# Altium PCB SC8701_EVM_RE1_0620.PcbDoc
Units mil, origin at the board's own origin, x right, y up, seen from the top; angles counter-clockwise.
Board outline 5000 x 3400 mil, 4 copper layers (Top Layer, Signal Layer 1, Signal Layer 2, Bottom Layer), stack 62.449 mil thick; 104 components, 48 nets, 304 pads, 9 vias.
Unrouted connection lines stored in the file: 170.
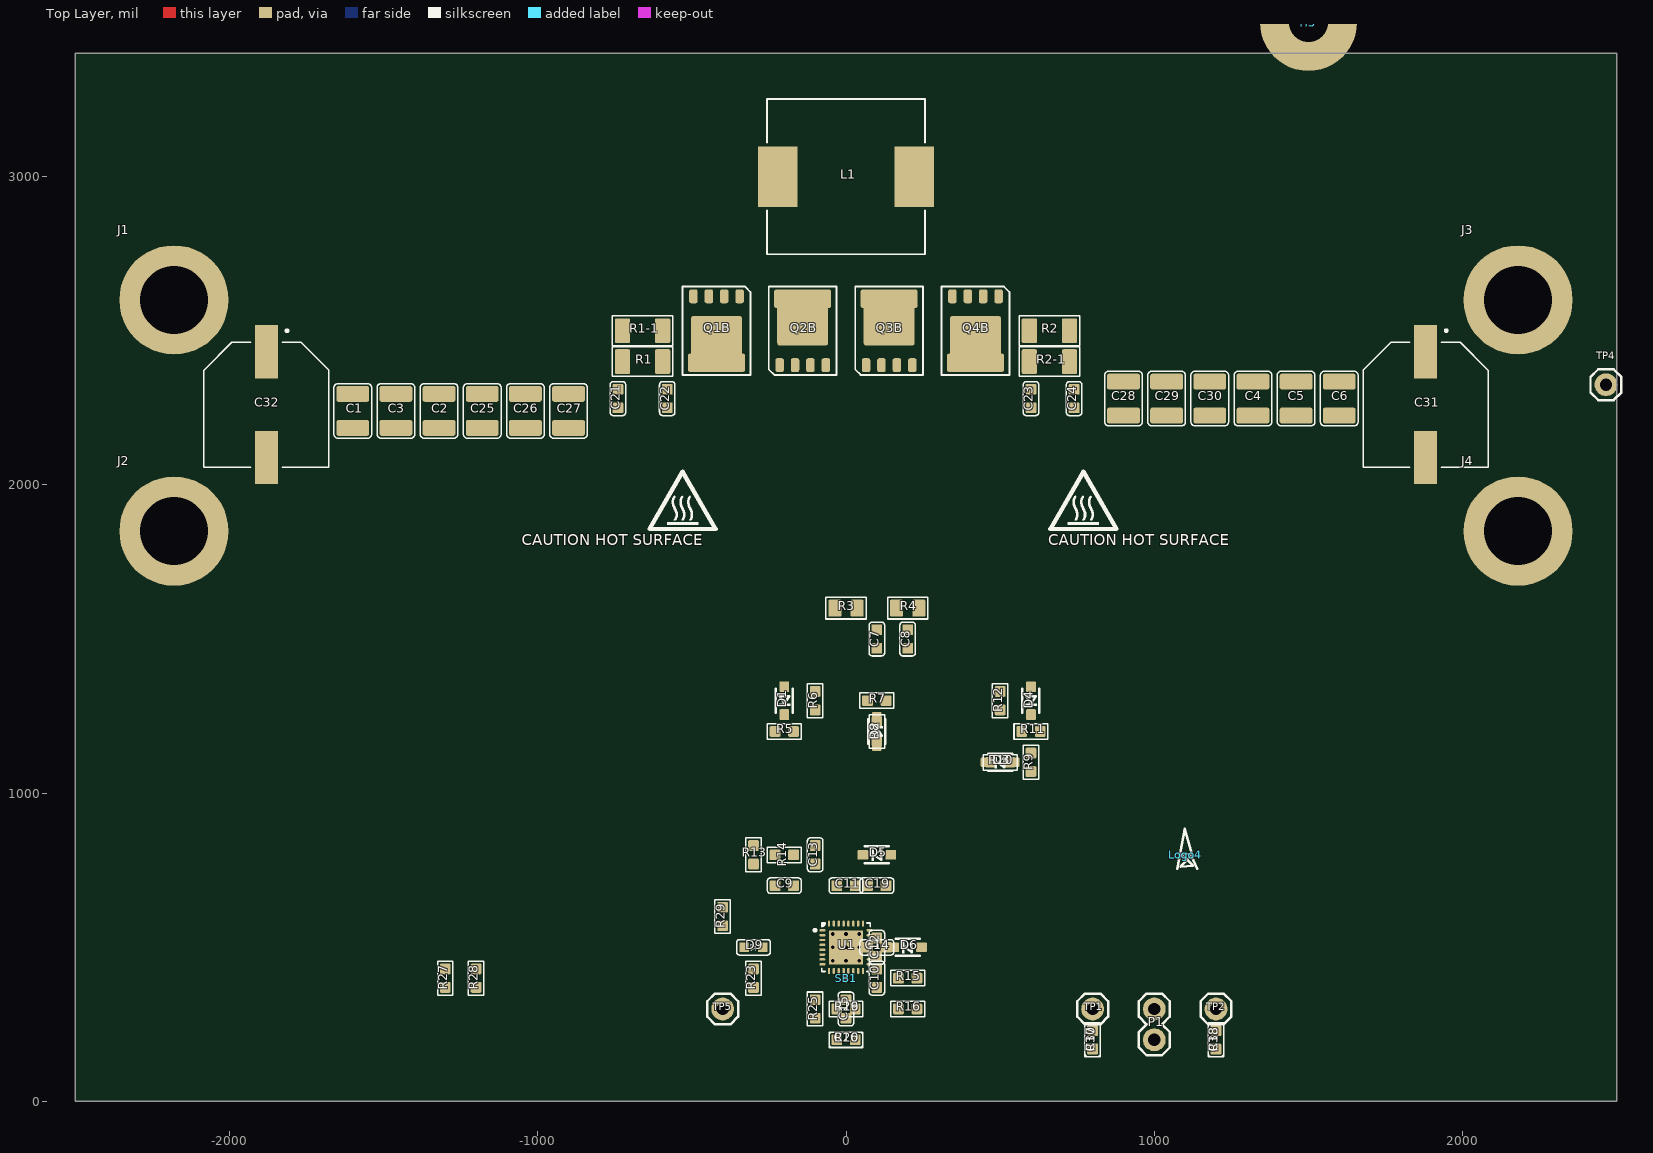
[diagram p0: Top Layer view]
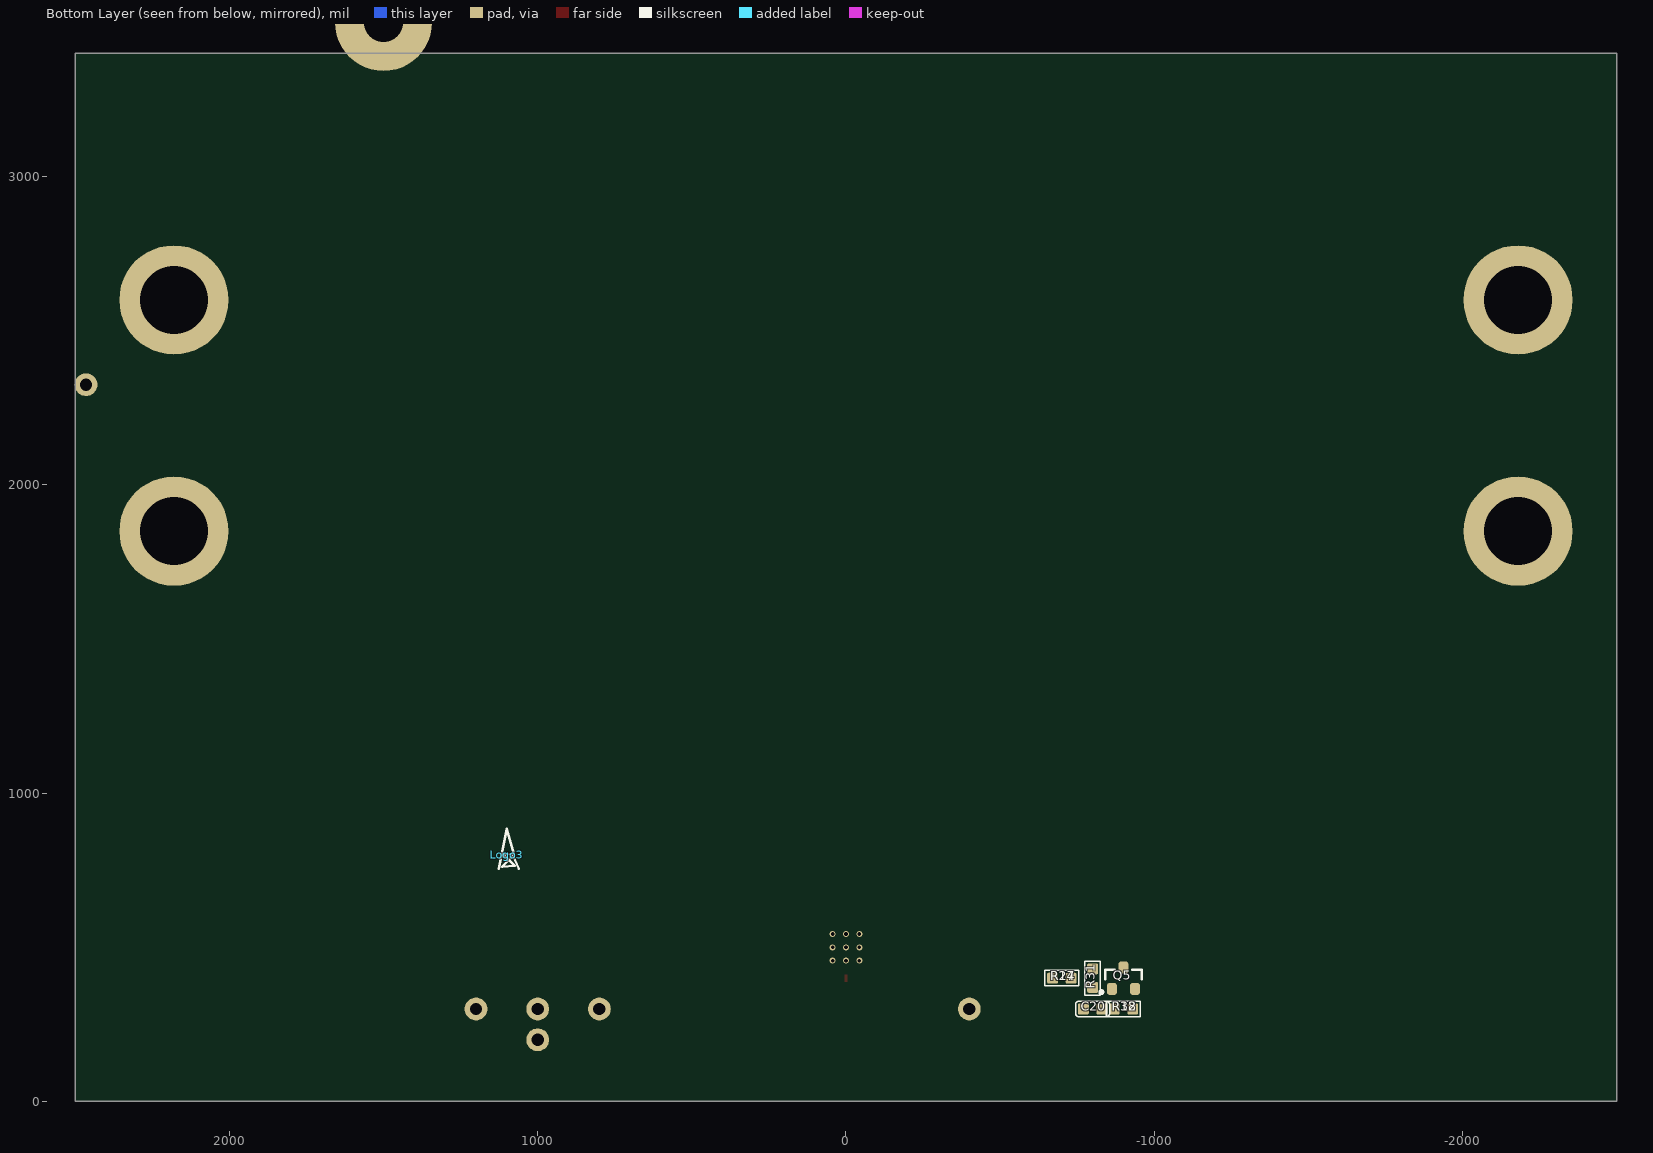
[diagram p1: Bottom Layer view, seen from below]

## Layer stack, top to bottom
Top Solder: solder mask 0.4, Solder Resist, Dk 3.5
Top Layer: signal copper 1.378
Dielectric1: prepreg 8.2835, FR-4, Dk 4.2
Signal Layer 1: signal copper 0.5984
Dielectric2: core 41.9291, Dk 4.2
Signal Layer 2: signal copper 0.5984
Dielectric3: prepreg 8.2835, Dk 4.2
Bottom Layer: signal copper 1.378
Bottom Solder: solder mask 0.4, Solder Resist, Dk 3.5

## Board outline
-2500,0 -2500,3400 2500,3400 2500,0

## Design rules (kind name [scope] priority, off if disabled: settings)
BoardOutlineClearance [All] p1: gap=11.81 ignorepadtopadclearanceinfootprint=FALSE except(0: Arc-SplitContinuation Track-SplitContinuation SMDPad-SplitContinuation THPad-SplitContinuation Via-SplitContinuation Fill-SplitContinuation Poly-SplitContinuation Region-SplitContinuation Text-SplitContinuation)
Clearance "Stitching VOUT" [IsStitchingVia and InNet('VOUT') vs (IsVia and (Not IsStitchingVia)) Or IsPad] p1: gap=5 ignorepadtopadclearanceinfootprint=FALSE
Clearance "PGND vs via" [(InNet('GND') AND InPolygon) vs IsVia] p2: gap=12 ignorepadtopadclearanceinfootprint=FALSE except(0: Arc-Hole Track-Hole SMDPad-Hole THPad-Hole Via-Hole Fill-Hole Poly-Hole Region-Hole Text-Hole)
Clearance "pour clearance_1" [InPolygon] p3: gap=10 ignorepadtopadclearanceinfootprint=FALSE except(0: Arc-Hole Track-Hole SMDPad-Hole THPad-Hole Via-Hole Fill-Hole Poly-Hole Region-Hole Text-Hole)
Clearance [All] p4: gap=7.8 ignorepadtopadclearanceinfootprint=FALSE except(0: Arc-Hole Track-Hole SMDPad-Hole THPad-Hole Via-Hole Fill-Hole Poly-Hole Region-Hole Text-Hole; 5.91: Arc-Via Track-Via SMDPad-SMDPad)
HoleSize [All] p1: absolutevalues=TRUE maxlimit=270 minlimit=11 maxpercent=80.000 minpercent=20.000
MinimumSolderMaskSliver [All] p1: minsoldermaskwidth=0
PlaneConnect PlaneConnect_1 [(InComponent('J1') AND InComponent('J2') AND InComponent('J3') AND InComponent('J4'))] p1: planeconnectstyle=Direct reliefexpansion=20 reliefentries=4 reliefconductorwidth=10 reliefairgap=10
PlaneConnect PlaneConnect_2 [InNet('AGND') and InNet('GND')] p2: planeconnectstyle=Relief reliefexpansion=20 reliefentries=4 reliefconductorwidth=10 reliefairgap=10
PlaneConnect [All] p3: planeconnectstyle=Direct reliefexpansion=20 reliefentries=4 reliefconductorwidth=10 reliefairgap=10
PolygonConnect AGND [All vs (HasFootprint('HDR1X2') OR HasFootprint('HDR1X3'))] p1: connectstyle=Relief reliefconductorwidth=10 reliefentries=4 polygonreliefangle="90 Angle" airgapwidth=10
PolygonConnect "P1 and P2" [All vs (InComponent('P1') OR InComponent('P2'))] p2: connectstyle=Relief reliefconductorwidth=10 reliefentries=4 polygonreliefangle="90 Angle" airgapwidth=10
PolygonConnect [All] p3: connectstyle=Direct reliefconductorwidth=10 reliefentries=4 polygonreliefangle="90 Angle" airgapwidth=10
RoutingVias [All] p1: holewidth=16 width=24 viastyle="Through Hole" minholewidth=12 minwidth=20 maxholewidth=28 maxwidth=50
ShortCircuit [InNet('AGND') vs InNet('PGND')] p1: allowed=TRUE
SilkToSilkClearance [All] p1 off: silktosilkclearance=7
SilkToSolderMaskClearance [IsPad] p1 off: minsilkscreentomaskgap=7 clearancetoexposedcopper=TRUE
SolderMaskExpansion SolderMaskExpansion_Via [ObjectKind = 'Via'] p1: expansion=2 istentingtop=TRUE
SolderMaskExpansion [All] p2: expansion=2 istentingtop=FALSE
Width [All] p1: maxlimit=30 minlimit=7.8 preferedwidth=7.87
24 further rules are at their usual default settings.

## Components (designator, comment, footprint, x,y, rotation, side; value= is the part's Value field where it differs from the comment)
C1 "10uF/50V" C1210 -1600,2240 r90 top
C2 "10uF/50V" C1210 -1320,2240 r90 top
C3 "10uF/50V" C1210 -1460,2240 r90 top
C4 "10uF/50V" C1210 1320,2280 r90 top
C5 "10uF/50V" C1210 1460,2280 r90 top
C6 "10uF/50V" C1210 1600,2280 r90 top
C7 "NC" C0603 100,1500 r90 top
C8 "NC" C0603 200,1500 r90 top
C9 "47pF/6.3V" C0603 -200,700 r0 top
C10 "47pF/6.3V" C0603 100,400 r270 top
C11 "100nF/16V" C0603 0,700 r0 top
C12 "100nF/16V" C0603 100,500 r270 top
C13 "1uF/50V" C0603 -100,800 r90 top
C14 "1uF/50V" C0603 100,500 r0 top
C15 "NC" C0603 0,300 r90 top
C16 "15nF/6.3V" C0603 0,200 r180 top
C17 "10nF/6.3V" C0603 800,200 r90 top
C18 "10nF/6.3V" C0603 1200,200 r90 top
C19 "1uF/16V" C0603 100,700 r180 top
C20 "1uF/50V" C0603 -800,300 r180 bottom
C21 "100nF/50V" C0603 -740,2280 r90 top
C22 "100nF/50V" C0603 -580,2280 r90 top
C23 "100nF/50V" C0603 600,2280 r90 top
C24 "100nF/50V" C0603 740,2280 r90 top
C25 "10uF/50V" C1210 -1180,2240 r90 top
C26 "10uF/50V" C1210 -1040,2240 r90 top
C27 "10uF/50V" C1210 -900,2240 r90 top
C28 "10uF/50V" C1210 900,2280 r90 top
C29 "10uF/50V" C1210 1040,2280 r90 top
C30 "10uF/50V" C1210 1180,2280 r90 top
C31 "100uF/50V" "CAP OS-CON D=10.0 L=10.0 F10" 1880,2260 r270 top
C32 "100uF/50V" "CAP OS-CON D=10.0 L=10.0 F10" -1880,2260 r270 top
D1 "1N4148" SOD-323 -200,1300 r270 top
D2 "1N4148" SOD-323 100,1200 r90 top
D3 "1N4148" SOD-323 500,1100 r180 top
D4 "1N4148" SOD-323 600,1300 r270 top
D5 "1N4148" SOD-323 100,800 r180 top
D6 "1N4148" SOD-323 200,500 r180 top
D9 "BLUE-LED" LED0603_BLUE -300,500 r0 top value=color?
H1 "HOLE" "M3.2 D=8" -3635,125 r0 top
H2 "HOLE" "M3.2 D=8" 3215,-25 r0 top
H3 "HOLE" "M3.2 D=8" 1500,3500 r0 top
H4 "HOLE" "M3.2 D=8" 4200,2500 r0 top
J1 "U6047" JACK_BANANA_U6047 -2180,2600 r0 top
J2 "U6047" JACK_BANANA_U6047 -2180,1850 r0 top
J3 "U6047" JACK_BANANA_U6047 2180,2600 r0 top
J4 "U6047" JACK_BANANA_U6047 2180,1850 r0 top
L1 "3.3uH" "INDUCTOR 1350 12.6X13.5X5.0mm" 0,3000 r0 top
LOGO1 "CAUTION HOT SURFACE" IEC_HotSurface_Small 9100,8200 r0 top
LOGO2 "CAUTION HOT SURFACE" IEC_HotSurface_Small 7800,8200 r0 top
Logo3 "OldGerman Symbol" ODG_LOGO 1100,800 r180 bottom
Logo4 "OldGerman Symbol" ODG_LOGO 1100,800 r0 top
P1 "CONN_X2" 2.54mm_Male_x2 1000,200 r90 top
P2 "CONN_X3" 2.54mm_Male_x3 5215,-925 r180 top
P3 "CONN_X3" 2.54mm_Male_x3 5415,-925 r0 top
P4 "CONN_X3" 2.54mm_Male_x3 6515,-925 r180 top
P5 "CONN_X3" 2.54mm_Male_x3 6915,-925 r180 top
P6 "CONN_X3" 2.54mm_Male_x3 7115,-925 r0 top
P7 "CONN_X2" 2.54mm_Male_x2 5815,-925 r0 top
Q1B "N-MOS_GDS" "SO8FL ROUND" -420,2500 r270 top
Q2B "N-MOS_GDS" "SO8FL ROUND" -140.39,2500 r90 top
Q3B "N-MOS_GDS" "SO8FL ROUND" 140,2500 r90 top
Q4B "N-MOS_GDS" "SO8FL ROUND" 420,2500 r270 top
Q5 "N-MOS" "INFINEON SOT-23-3" -900,400 r90 bottom
R1 "10mR" R1206 -660,2400 r0 top
R1-1 "NC" R1206 -660,2500 r0 top
R2 "10mR" R1206 660,2500 r0 top
R2-1 "NC" R1206 660,2400 r0 top
R3 "NC" R0805 0,1600 r180 top
R4 "NC" R0805 200,1600 r0 top
R5 "0R" R0603 -200,1200 r180 top
R6 "0R" R0603 -100,1300 r90 top
R7 "0R" R0603 100,1300 r0 top
R8 "0R" R0603 100,1200 r270 top
R9 "0R" R0603 600,1100 r90 top
R10 "0R" R0603 500,1100 r0 top
R11 "0R" R0603 600,1200 r0 top
R12 "0R" R0603 500,1300 r90 top
R13 "1K" R0603 -300,800 r90 top
R14 "1K" R0603 -200,800 r180 top
R15 "1K" R0603 200,400 r180 top
R16 "1K" R0603 200,300 r180 top
R17 "200K" R0603 -700,400 r0 bottom
R18 "10K" R0603 -900,300 r180 bottom
R19 "100K" R0603 0,300 r0 top
R20 "32.4K" R0603 0,200 r180 top
R23 "0R" R0603 -300,400 r90 top
R24 "100K" R0603 -700,400 r0 bottom
R25 "68K" R0603 -100,300 r90 top
R26 "15K" R0603 0,300 r0 top
R27 "100K" R0603 -1300,400 r90 top
R28 "150K" R0603 -1200,400 r270 top
R29 "100K" R0603 -400,600 r270 top
R30 "12.1K" R0603 800,200 r90 top
R31 "100K" R0603 -800,400 r90 bottom
R32 "24K" R0603 -900,300 r0 bottom
R33 "40.2K" R0603 1200,200 r90 top
SB1 "NetTie_200um" NetTie_200um 0,400 r90 top net-tie
TP1 "CONN_X1_DOT" 2.54mm_Male_x1 800,300 r0 top
TP2 "CONN_X1_DOT" 2.54mm_Male_x1 1200,300 r0 top
TP3 "CONN_X1_DOT" 2.54mm_Male_x1 3455,2045 r0 top
TP4 "CONN_X1_DOT" 2.54mm_Male_x1 2465,2325 r0 top
TP5 "CONN_X1_DOT" 2.54mm_Male_x1 -400,300 r0 top
U1 "SC8701 (A)" "TQFN-32 4X4MM 0.4 VIA" 0,500 r0 top

## Footprints (in the part's own frame and the unit in brackets; to place one, negate y for a bottom-side part, rotate by r counter-clockwise, add the part's x,y. Pads: shape width x height; smd on the part's side, far side on the other; paste and mask are expansions set on the pad)
2.54mm_Male_x1 [mil]
  round 74 hole 40: 1(0,0)
  silkscreen extent -50,-50 50,50
2.54mm_Male_x2 [mil]
  round 74 hole 40: 1(0,0) 2(100,0)
  silkscreen extent -50,-50 150,50
2.54mm_Male_x3 [mil]
  round 74 hole 40: 1(0,0) 2(100,0) 3(200,0)
  silkscreen extent -50,-50 250,50
C0603 [mil]
  rrect20% 35x35 smd: 1(-30,0) 2(30,0)
  silkscreen extent -55,-25 55,25, body extent -31,-16 32,16, height 32
C1210 [mm] "Chip Capacitor, 2-Leads, Body 3.20x2.50mm, IPC Medium Density"
  rrect25% 1.3x2.7 smd: 1(-1.4,0) 2(1.4,0)
  silkscreen extent -2.25,-1.55 2.25,1.55, body extent -1.6,-1.25 1.6,1.25, height 2.8
"CAP OS-CON D=10.0 L=10.0 F10" [mm]
  rect 4.4x1.9 smd: 1(-4.35,0) 2(4.35,0)
  silkscreen extent -6.2,-5.15 5.15,5.15, body extent -5.5,-5.15 5.5,5.15, height 10.4
IEC_HotSurface_Small [mil] "CAUTION HOT SURFACE"
  silkscreen extent -8437,-6343 -8223,-6158
"INDUCTOR 1350 12.6X13.5X5.0mm" [mm]
  rect 3.25x5 smd: 1(-5.625,0) 2(5.625,0)
  silkscreen extent -6.5,-6.4 6.5,6.4, body extent -6.5,-6.4 6.5,6.4, height 6.2
"INFINEON SOT-23-3" [mm] "SOT23, 3-Leads, Body 2.90x2.40mm, Pitch 0.95mm, IPC Medium Density"
  rrect50% 0.972x0.802 smd: 1(-0.885,0.95) 2(-0.885,-0.95) 3(0.885,0)
  silkscreen extent -1.27,-1.5 0.7,1.95, body extent -1.16,-1.45 1.16,1.45, height 1
JACK_BANANA_U6047 [mm] "Banana Jack"
  round 9 hole 5.6: 1(0,0)
  body extent -3.49,-3.5 3.49,3.5, height 2
LED0603_BLUE [mm] "Chip Diode, 2-Leads, Body 1.60x0.80mm, IPC Medium Density"
  rrect20% 0.8x0.8 smd: 1(-0.762,0) 2(0.762,0)
  silkscreen extent -1.4,-0.64 1.4,0.64, body extent -0.8,-0.4 0.8,0.4, height 0.53
"M3.2 D=8" [mm]
  round 8 hole 3.2: 1(0,0)
NetTie_200um [mm]
  round 0.2 smd paste-2 mask-2: 1(-0.3,0) 2(0.3,0)
  Top Layer region: -0.3,0.1 -0.3,-0.1 0.3,-0.1 0.3,0.1
ODG_LOGO [mil]
  silkscreen extent -26,-46 39,84
R0603 [mil]
  rrect25% 35x35 smd: 1(-30,0) 2(30,0)
  silkscreen extent -55,-25 55,25, body extent -31,-16 31,16, height 18
R0805 [mil]
  rrect20% 42.5x55 smd: 1(-36.26,0) 2(36.26,0)
  silkscreen extent -65,-35 65,35, body extent -39,-25 39,25, height 24
R1206 [mil]
  rrect20% 50x80 smd: 1(-65,0) 2(65,0)
  silkscreen extent -98,-48 98,48, body extent -63,-31 63,31, height 24
"SO8FL ROUND" [mm] "AND9137/D Universal Footprint"
  rrect12% 3.3x4.2 smd paste-10 mask+0.075: D(0.438,0)
  rrect20% 1.5x4.7 smd paste-10 mask+0.075: D(2.638,0)
  rrect50% 1.15x0.7 smd paste-0.05 mask+0.075: G(-2.837,-1.905) S(-2.837,1.905) S(-2.837,-0.635) S(-2.837,0.635)
  rect 0.6x0.9 on Top Paste: ""(-0.662,1.15) ""(-0.662,0) ""(-0.662,-1.15) ""(0.188,1.15) ""(0.188,0) ""(0.188,-1.15) ""(1.038,1.15) ""(1.038,0) ""(1.038,-1.15) ""(1.888,1.15) ""(1.888,0) ""(1.888,-1.15)
  rect 0.9x0.6 on Top Paste: ""(2.888,1.875) ""(2.888,-0.65) ""(2.888,0.65) ""(2.888,-1.875)
  silkscreen extent -3.64,-2.79 3.64,2.8, body extent -3.06,-2.58 3.09,2.57, height 1.13
SOD-323 [mm] "AND9137/D：Universal Footprint for  SO8FL Package"
  rrect25% 0.9x0.8 smd: 1(-1.15,0) 2(1.15,0)
  silkscreen extent -1,-0.7 1,0.7, body extent -1.36,-0.62 1.36,0.63, height 1.05
"TQFN-32 4X4MM 0.4 VIA" [mm]
  oval 0.5x0.2 smd: 1(-1.95,1.4) 2(-1.95,1) 3(-1.95,0.6) 4(-1.95,0.2) 5(-1.95,-0.2) 6(-1.95,-0.6) 7(-1.95,-1) 8(-1.95,-1.4) 17(1.95,-1.4) 18(1.95,-1) 19(1.95,-0.6) 20(1.95,-0.2) 21(1.95,0.2) 22(1.95,0.6) 23(1.95,1) 24(1.95,1.4)
  oval 0.2x0.5 smd: 9(-1.4,-1.95) 10(-1,-1.95) 11(-0.6,-1.95) 12(-0.2,-1.95) 13(0.2,-1.95) 14(0.6,-1.95) 15(1,-1.95) 16(1.4,-1.95) 25(1.4,1.95) 26(1,1.95) 27(0.6,1.95) 28(0.2,1.95) 29(-0.2,1.95) 30(-0.6,1.95) 31(-1,1.95) 32(-1.4,1.95)
  rect 2.8x2.8 smd paste-5: 33(0,0)
  silkscreen extent -2.66,-2 2,2, body extent -2,-2 2,2, height 0.55

## Part data
C1 C2 C3 C4 C5 C6 C7 C8 C9 C10 C11 C12 C13 C14 C15 C16 C17 C18 C19 C20 C21 C22 C23 C24 C25 C26 C27 C28 C29 C30: library part CAP, "Capacitor"
C31 C32: library part CAP_Polar_Aluminum, "Capacitor"
D1 D2 D3 D4 D5 D6: library part Diode, "二极管"
D9: library part LED, "LED"
J1 J2 J3 J4: library part JACK_BANANA, "Banana Jack", Manufacturer=Keystone, PartNumber=575-8, Supplier Part Number 1=36-575-8-ND, ComponentLink1Description="Datasheet Link", ComponentLink1URL=http://www.keyelco.com/pdfs/M55p95.pdf, CompType=Connector, LatestRevisionDate=2015-08-25, MountType=TH, PackageReference=Keystone575-8, Publisher="Texas Instruments", RoHS=Y, Supplier 1=Digi-Key, U/M=EA
L1: library part Inductor_power, "135 功率电感 额定电流15A"
LOGO1 LOGO2: library part IEC_HotSurface, "IEC 61010-1 Hot Surface Warning", LatestRevisionDate=2014-11-20, Published=2009-03-03, Publisher="Texas Instruments", SymbolCreator=a0412235, SymbolVersion=2011-08-22
Logo3 Logo4: library part OldGeman, LatestRevisionDate=2014-11-20, Published=2009-03-03, Publisher="Texas Instruments", SymbolCreator=a0412235, SymbolVersion=2011-08-22
Q5: library part N-MOS_123
R1 R1-1 R2 R2-1 R3 R4 R5 R6 R7 R8 R9 R10 R11 R12 R13 R14 R15 R16 R17 R18 R19 R20 R23 R24 R25 R26 R27 R28 R29 R30 R31 R32 R33: library part RES, "IEC Standard"
SB1: library part "NetTie 0.2mm", "Net Tie", Part number IPS=N.A., Artikkelnr Noca=N.A., Component Class=Connectors, ComponentLink1Description=Datasheet, ComponentLink2Description="Supplier link", Footprint Doc=NetTie, LatestRevisionDate=2019-10-07, Pad Count=2, Part Number="NetTie 0.2mm", PartId=100500654, Pin Count=2, Published=2019-10-07, Publisher="Nordic Semiconductor"
U1: "高效率, 同步, 4 管升降压控制器"

## Via types
v1: diameter 19.68, hole 11.81, Top Layer to Bottom Layer, tented both sides, 9 vias

## Nets (pads, with @x,y where several pads share a name; then routed paths per layer and width w, separated by ;. In a path a pad name is that pad's centre, name@x,y a point inside that pad or via, vN(x,y) a via of type N, cw(c..) or ccw(c..) an arc to the next point about the centre after c; other vN are vias at no path point)
/CE: P2.2 R24.2 U1.1
AGND: C15.1 C16.1 C17.1 C18.1 C20.2 P1.1 P1.2 P2.3 P3.1 P4.1 P5.3 P6.1 P7.1 P7.2 Q5.2 R20.1 R23.1 R25.1 R28.1 R32.1 SB1.1 U1.14
ILIM1: C17.2 R30.2 TP1.1 U1.11
ILIM2: C18.2 R33.2 TP2.1 U1.12
IPWM: P4.2 U1.5
ITUNE: P5.1 P6.3 U1.6
NetC7_2: C7.2 R3.1
NetC8_2: C8.2 R4.1
NetC9_1: C9.1 R13.1 U1.32
NetC9_2: C9.2 R14.1 U1.31
NetC10_1: C10.1 R15.2 U1.18
NetC10_2: C10.2 R16.2 U1.17
NetC11_1: C11.1 D5.2 U1.29
NetC11_2: C11.2 L1.1 Q1B.S Q2B.D R3.2 TP3.1 U1.27
NetC12_1: C12.1 L1.2 Q3B.D Q4B.S R4.2 TP4.1 U1.22
NetC12_2: C12.2 D6.2 U1.20
NetC15_2: C15.2 R26.2 U1.15
NetC16_2: C16.2 R26.1
NetC20_1: C20.1 R24.1 R31.1
NetC22_2: C22.2 Q1B.D R1-1.2 R1.2 R14.2
NetC23_2: C23.2 Q4B.D R2-1.1 R2.1 R15.1
NetD1_1: D1.1 Q1B.G R6.2
NetD1_2: D1.2 R5.2 R6.1
NetD2_1: D2.1 Q2B.G R8.2
NetD2_2: D2.2 R7.2 R8.1
NetD3_1: D3.1 Q3B.G R10.2
NetD3_2: D3.2 R9.2 R10.1
NetD4_1: D4.1 Q4B.G R12.2
NetD4_2: D4.2 R11.2 R12.1
NetD9_1: D9.1 R29.2
NetP5_2: P5.2 R30.1
NetP6_2: P6.2 R33.1
NetQ5_1: Q5.1 R18.1 R32.2
NetQ5_3: Q5.3 R17.1 R31.2
NetR5_1: R5.1 U1.28
NetR7_1: R7.1 U1.26
NetR9_1: R9.1 U1.23
NetR11_1: R11.1 U1.21
NetR19_1: R19.1 R20.2 U1.16
NetR23_2: R23.2 U1.8
NetR25_2: R25.2 U1.10
PG: D9.2 TP5.1 U1.4
PGND: C1.1 C2.1 C3.1 C4.1 C5.1 C6.1 C7.1 C8.1 C13.2 C14.2 C19.2 C21.1 C22.1 C23.1 C24.1 C25.1 C26.1 C27.1 C28.1 C29.1 C30.1 C31.2 C32.2 J2.1 J4.1 Q2B.S Q3B.S SB1.2 U1.25 U1.33
  other v1: -43.31,456.69 0,456.69 43.31,456.69 -43.31,500 0,500 43.31,500 -43.31,543.31 0,543.31 43.31,543.31
PWM: P3.2 U1.3
VCC: C19.1 D5.1 D6.1 R17.2 R29.1 U1.24
VHI: P2.1 P3.3 P4.3 R27.1 R28.2
VIN: C1.2 C2.2 C3.2 C13.1 C21.2 C25.2 C26.2 C27.2 C32.1 J1.1 R1-1.1 R1.1 R13.2 R27.2 U1.30
VOUT: C4.2 C5.2 C6.2 C14.1 C24.2 C28.2 C29.2 C30.2 C31.1 J3.1 R2-1.2 R2.2 R16.1 R18.2 R19.2 U1.19
pads on no net: H1.1 H2.1 H3.1 H4.1 Q1B. Q2B. Q3B. Q4B. U1.2 U1.7 U1.9 U1.13

## Polygon pours and split planes (outlines as drawn)
VOUT on Top Layer "1-VBAT" (solid, remove dead copper, pour order 67): 1825,6195 875,6195 875,7295 1825,7295
NetC22_2 on Top Layer "Top Layer-No Net" (solid, remove dead copper, pour order 52): -545,6650 -545,6370 -150,6370 -150,6650
NetC11_2 on Top Layer "Top Layer-No Net" (solid, remove dead copper, pour order 54): -135,7055 -135,6160 95,6160 95,7055
NetC12_1 on Top Layer "Top Layer-No Net" (solid, remove dead copper, pour order 56): 225,7055 465,7055 465,6160 225,6160
NetC23_2 on Top Layer "Top Layer-No Net" (solid, remove dead copper, pour order 61): 475,6655 475,6515 475,6375 855,6375 855,6655
AGND on Top Layer "1-AGND" (solid, remove dead copper, pour order 53): -1485,5505 -710,5505 -660,5455 -635,5455 -394,5455 150,5447.33 150,5455 705,5455 1870,5455 1860,5415 1870,5405 1870,4820 -1485,4820
VIN on Top Layer "1-VBUS" (solid, remove dead copper, pour order 63): -1495,6190 -560,6190 -560,7290 -1495,7290
PGND on Top Layer "1-PGND" (solid, remove dead copper, pour order 69): -1535,7325 -1535,4775 1865,4775 1865,7325
VOUT on Bottom Layer "4-VBAT" (solid, remove dead copper, pour order 68): 875,7250 875,6190 1785,6190 1785,7250
NetC23_2 on Bottom Layer "Top Layer-No Net" (solid, remove dead copper, pour order 60): 470,6660 470,6370 865,6370 865,6660
NetC12_1 on Bottom Layer "Top Layer-No Net" (solid, remove dead copper, pour order 58): 225,7055 225,6160 460,6160 460,7055
NetC11_2 on Bottom Layer "Top Layer-No Net" (solid, remove dead copper, pour order 57): -135,7055 -135,6610 -135,6165 -135,6160 100,6160 100,7055
NetC22_2 on Bottom Layer "Top Layer-No Net" (solid, remove dead copper, pour order 59): -550,6650 -550,6370 -145,6370 -145,6630 -145,6650 -240,6650 -340,6650
AGND on Bottom Layer "4-AGND" (solid, remove dead copper, pour order 55): -1460,5505 -560,5505 -425,5640 -270.94,5640 -225,5594.06 -225,5450 -205,5430 1820,5430 1820,4855 -1460,4855
VIN on Bottom Layer "4-VBUS" (solid, remove dead copper, pour order 66): -1505,6190 -560,6190 -560,7285 -1505,7285
PGND on Bottom Layer "4-PGND" (solid, remove dead copper, pour order 70): -1535,7325 -1535,4825 1865,4825 1865,7325
PGND on Signal Layer 2 "3-PGND" (solid, remove dead copper, pour order 22): -1535,7325 -1535,4825 1865,4825 1865,7325
PGND on Signal Layer 1 "2-PGND" (solid, remove dead copper, pour order 71): -1535,7325 -1535,4825 1865,4825 1865,7325

## Silkscreen, mask and mechanical layers (free items; w line width, h text height)
Top Overlay:
  text "SW1" at -3209.35,7270 h40
  text "SW2" at -2464.35,7270 h40
  text "VIN" at -3959.35,7065 h80
  text "VOUT" at -1839.35,7065 h80
  text "SC8701-EVM-RE0" at -2634.35,6295 h100
  text "2023.6" at -2054.35,6220 h60
  text "PGND" at -3969.35,6135 h80
  text "PGND" at -1829.35,6135 h80
  text "ILIM1" at -2289.35,5805 h40
  text "ILIM2" at -1684.35,5805 h40
  text "PG" at -3474.35,5685 h40
  text "AGND" at -2000,5587.2 h40
  text "For ILIM1" at -2300.98,5542.38 h40
  text "For ILIM2" at -1903.32,5542.38 h40
  text "AGND" at -4000,5387.2 h40
  text "/CE" at -3878.16,5387.22 h40
  text "VHI" at -3777.41,5387.22 h40
  text "AGND" at -3600,5387.2 h40
  text "PWM" at -3490.28,5387.22 h40
  text "VHI" at -3377.41,5387.22 h40
  text "AGND" at -3200,5387.2 h40
  text "VHI" at -2677.41,5387.22 h40
  text "IPWM" at -2594.94,5387.22 h40
  text "AGND" at -2500,5387.2 h40
  text "AGND" at -2300,5387.2 h40
  text "ITUNE" at -2100.29,5387.42 h40
  text "AGND" at -1900,5387.2 h40
  text "ITUNE" at -1700.29,5387.42 h40
Mechanical 13:
  the board outline again, w10